# Altium PCB PCB1.PcbDoc
Units mm, origin at the board's own origin, x right, y up, seen from the top; angles counter-clockwise.
Board outline 59.94 x 91.22 mm, 2 copper layers (Top Layer, Bottom Layer); 64 components, 43 nets, 249 pads, 20 vias.
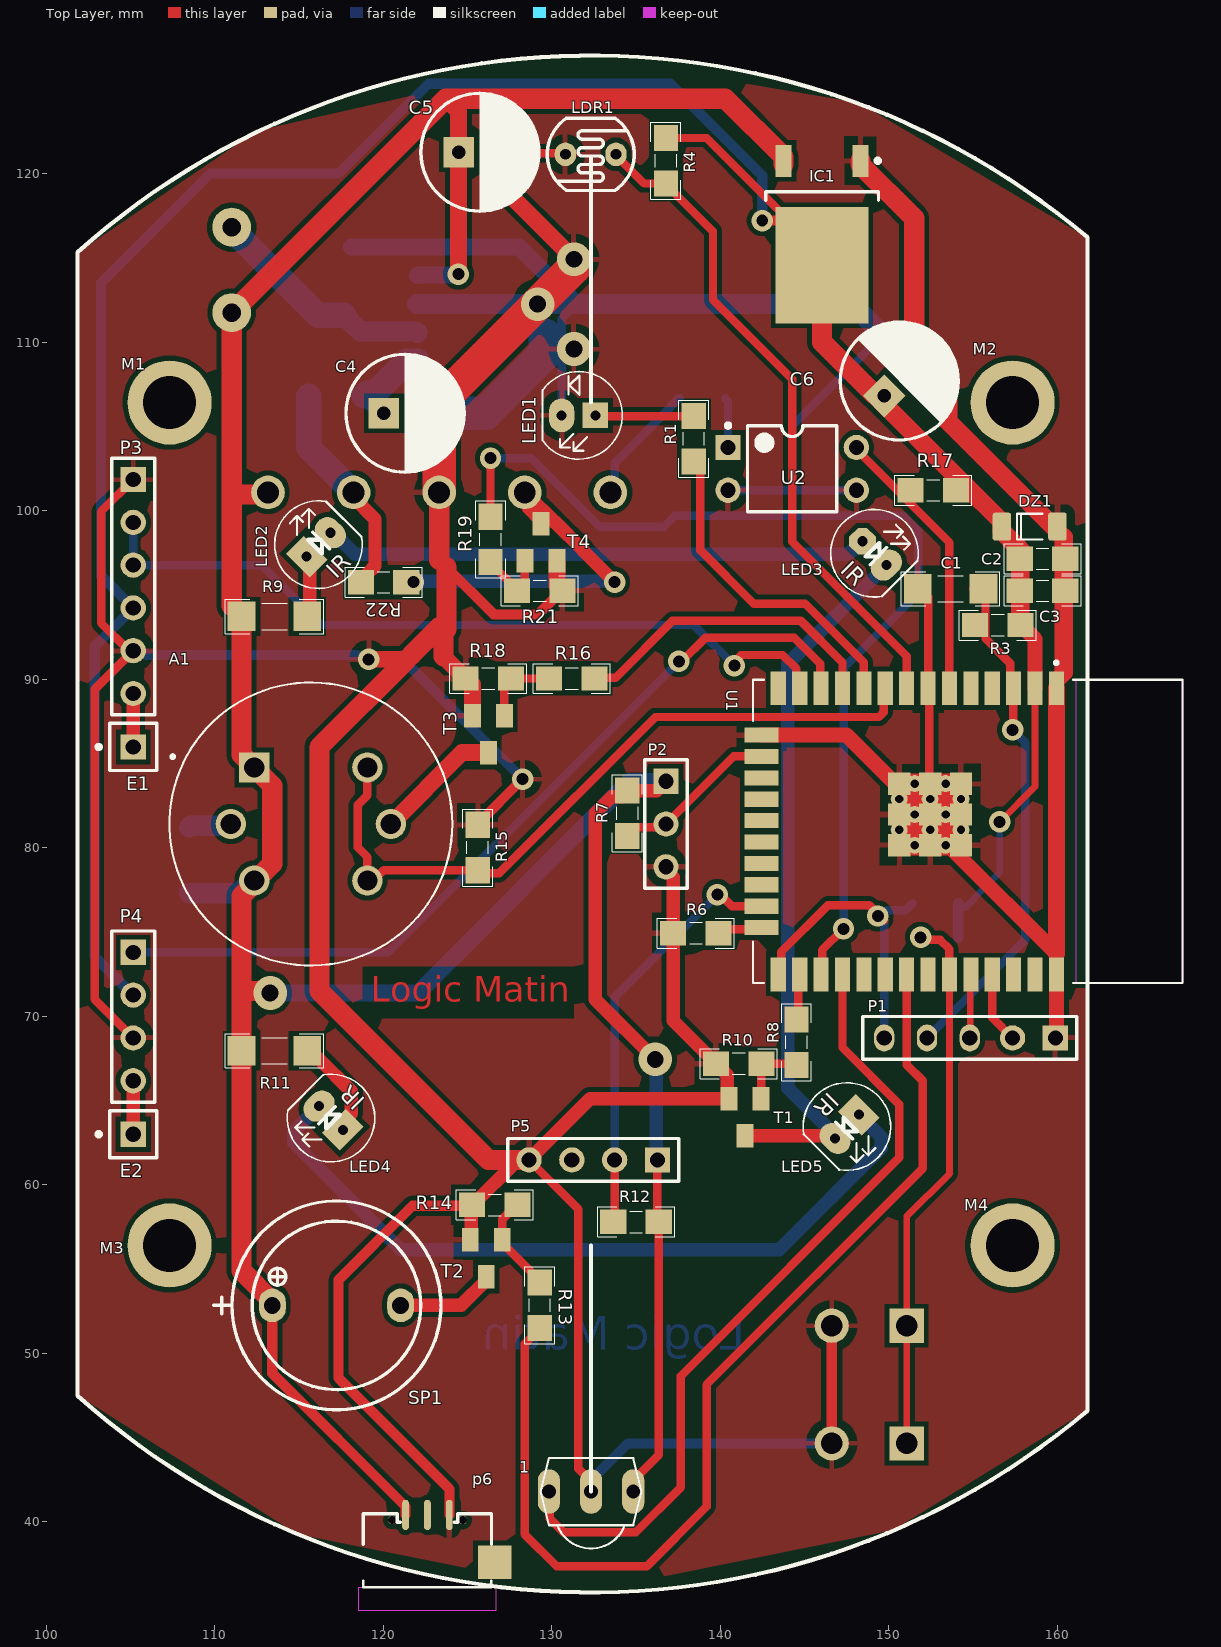
[diagram p0: Top Layer view]
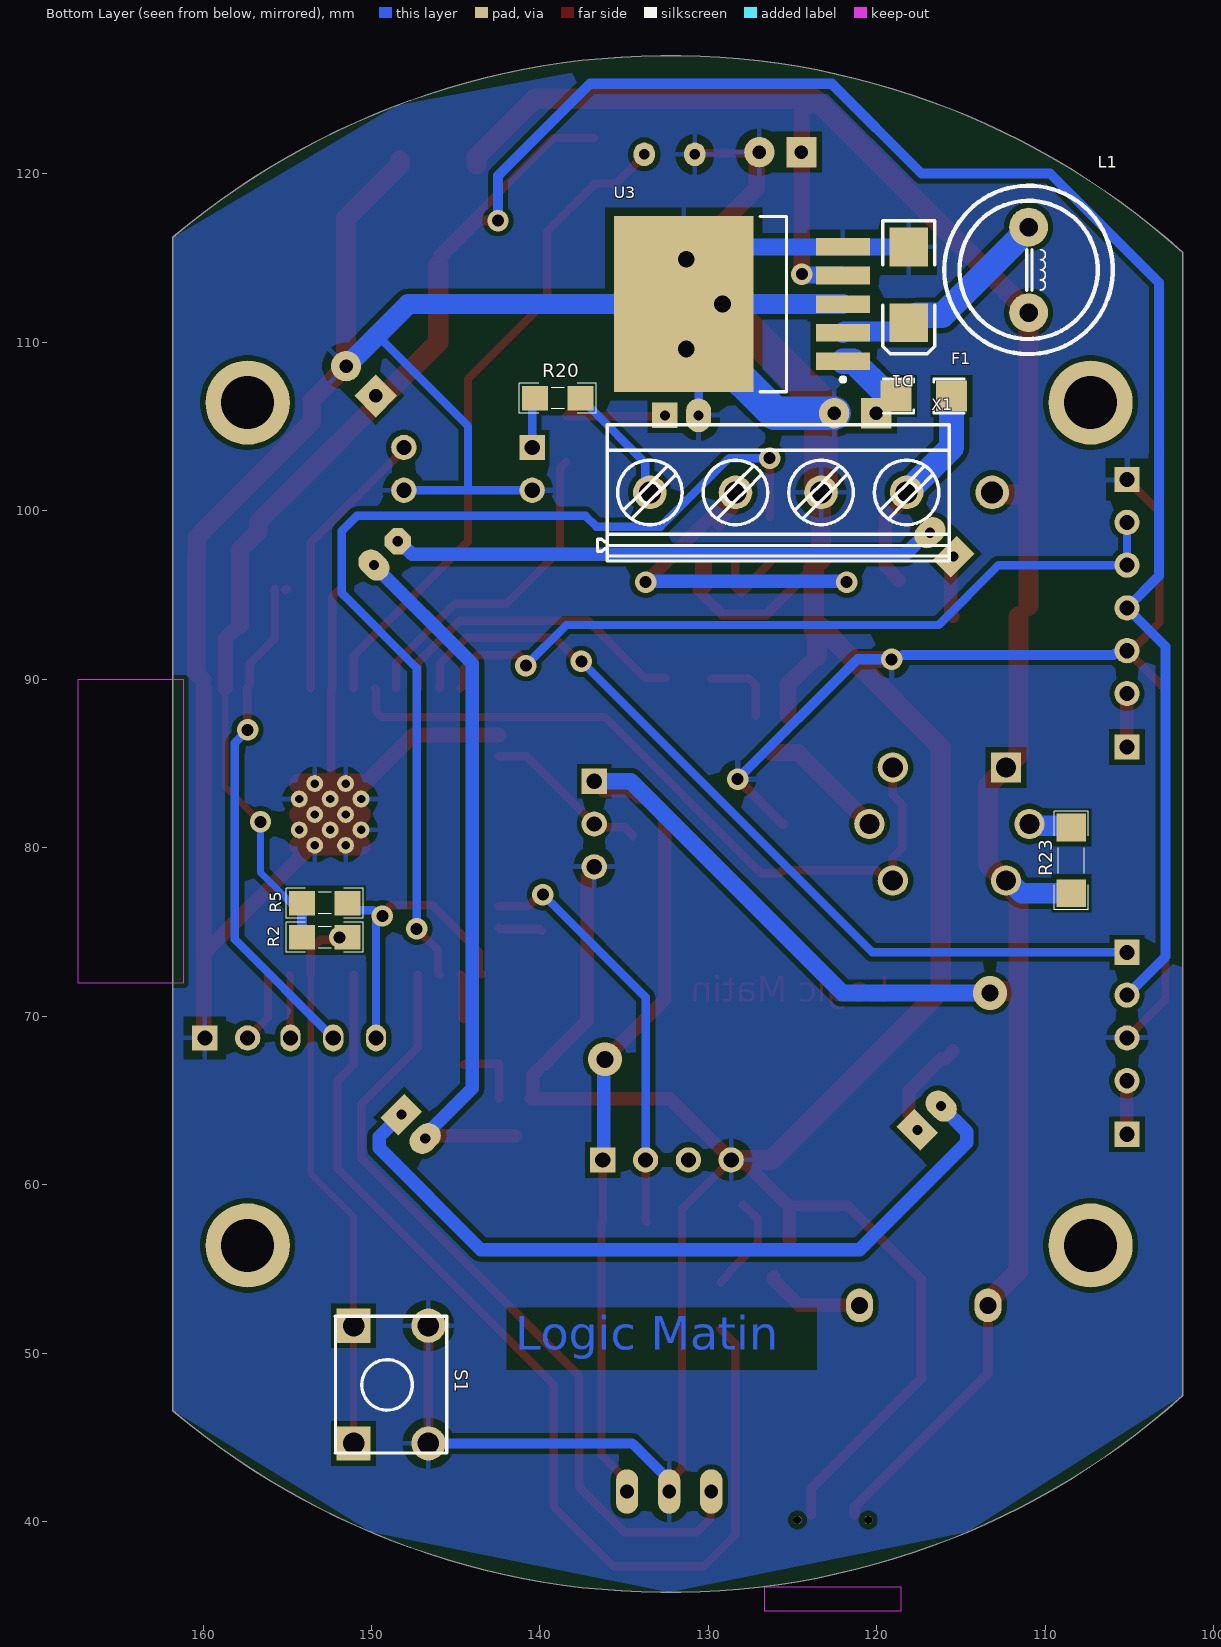
[diagram p1: Bottom Layer view, seen from below]

## Layer stack, top to bottom
Top Solder: solder mask 0.0102, Solder Resist, Dk 3.5
Top Layer: signal copper 0.0356
Dielectric 1: dielectric 0.32, FR-4, Dk 4.8
Bottom Layer: signal copper 0.0356
Bottom Solder: solder mask 0.0102, Solder Resist, Dk 3.5

## Board outline
101.854,47.471 ccw(c132.334,81.407) 161.798,46.585 161.798,116.229 ccw(c132.334,81.407) 101.854,115.343

## Design rules (kind name [scope] priority, off if disabled: settings)
Clearance [All] p1: gap=0.3 ignorepadtopadclearanceinfootprint=FALSE except(0: Arc-Hole Track-Hole SMDPad-Hole THPad-Hole Via-Hole Fill-Hole Poly-Hole Region-Hole Text-Hole; 0.254: Arc-Text Track-Text SMDPad-Text THPad-Text Via-Text Fill-Text Poly-Text Region-Text Text-Text)
PolygonConnect [All] p1: connectstyle=Relief reliefconductorwidth=0.3 reliefentries=4 polygonreliefangle="90 Angle" airgapwidth=0.5
RoomDefinition Main [InComponentClass('Main')] p1: confinementstyle=ConfineIn formatcopy=TRUE lockcomponents=FALSE outline 101.6,34.29 167.767,34.29 167.767,127.127 101.6,127.127
RoutingVias [All] p1: holewidth=0.711 width=1.27 viastyle="Through Hole" minholewidth=0.711 minwidth=1.27 maxholewidth=0.711 maxwidth=1.27
SolderMaskExpansion [All] p1: expansion=0.102 istentingtop=FALSE
Width [All] p1: maxlimit=10 minlimit=0.3 preferedwidth=0.3 minimp=50.000000 maximp=50.000000 favimp=50.000000
30 further rules are at their usual default settings.

## Components (designator, comment, footprint, x,y, rotation, side; value= is the part's Value field where it differs from the comment)
1 "TSOP1838" TSOP18XX 132.335,41.81 r0 top
A1 "MQ-2" XDCR_MQ-7 115.697,81.407 r0 top
C1 "1nF" CAPC4817X12N 153.67,95.377 r0 top
C2 "10nF" CAPC3413X12N 159.131,97.155 r180 top
C3 "100nF" CAPC3413X12N 159.131,95.25 r180 top
C4 "220uF16V" "Cap electrolitic radial 6x7-2.5" 121.285,105.791 r0 top
C5 "" "Cap electrolitic radial 6x7-2.5" 125.73,121.285 r0 top value=2200uF6.3V
C6 "2200uf" "Cap electrolitic radial 6x7-2.5" 150.627,107.701 r45 top value=2200uF6.3V
D1 "D Schottky" SMB 118.11,113.411 r270 bottom
DZ1 "3.3V" "SOD80, LL-34" 158.369,99.06 r0 top
E1 "Antenna" PIN1 105.156,85.979 r90 top
E2 "Antenna" PIN1 105.156,62.992 r90 top
F1 "F=1.0 A" "1206 FUSE" 117.221,106.807 r0 bottom
IC1 "LM1117DT-x.x" TD03B_N 146.044,116.427 r270 top
L1 "100µH 3A" "Inductor 10x12 (200 mils)" 110.998,114.3 r270 bottom
LDR1 "PhotoCell" PhotoCell 132.31,121.158 r180 top
LED1 "Red" LED-5mm 132.588,105.664 r180 top
LED2 "Red" LED-5mm-IR#1 115.443,97.282 r45 top
LED3 "Red" LED-5mm-IR#2 148.446,98.188 r315 top
LED4 "Red" LED-5mm-IR#1 117.602,63.246 r135 top
LED5 "Red" LED-5mm-IR#1 148.226,64.152 r225 top
M1 "Screw" "Board Screw_No Silk" 107.315,106.426 r0 top
M2 "Screw" "Board Screw_No Silk" 157.353,106.426 r0 top
M3 "Screw" "Board Screw_No Silk" 107.315,56.388 r0 top
M4 "Screw" "Board Screw_No Silk" 157.353,56.388 r0 top
P1 "Header 5" HDR1X5 159.893,68.707 r180 top
P2 "PIR Sensor" HDR1X3 136.779,83.947 r270 top
P3 "Header 6" HDR1X6 105.156,101.854 r270 top
P4 "Header 4" HDR1X4 105.156,73.787 r270 top
P5 "DHT11" HDR1X4 136.271,61.468 r180 top
p6 "USB Connector" USB_AB_BM_SHS 122.619,38.892 r180 top
R1 "220" RESC3413X04N 138.43,104.267 r270 top
R2 "4K7" RESC3413X04N 152.781,74.676 r0 bottom
R3 "10K" RESC3413X04N 156.464,93.218 r0 top
R4 "10K" RESC3413X04N 136.779,120.777 r90 top
R5 "4K7" RESC3413X04N 152.781,76.708 r0 bottom
R6 "4K7" RESC3413X04N 138.557,74.93 r0 top
R7 "4k7" RESC3413X04N 134.493,82.042 r270 top
R8 "120" RESC3413X04N 144.526,68.453 r270 top
R9 "33" RESC4817X04N 113.538,93.726 r180 top
R10 "10K" RESC3413X04N 141.097,67.183 r0 top
R11 "33" RESC4817X04N 113.538,67.945 r180 top
R12 "4K7" RESC3413X04N 135.001,57.785 r180 top
R13 "120" RESC3413X04N 129.286,52.832 r90 top
R14 "10K" RESC3413X04N 126.619,58.801 r0 top
R15 "10K" RESC3413X04N 125.603,80.01 r90 top
R16 "120" RESC3413X04N 131.191,90.043 r180 top
R17 "1K" RESC3413X04N 152.654,101.219 r0 top
R18 "10K" RESC3413X04N 126.238,90.043 r0 top
R19 "120" RESC3413X04N 126.365,98.298 r270 top
R20 "1K" RESC3413X04N 138.938,106.68 r180 bottom
R21 "10K" RESC3413X04N 129.286,95.25 r180 top
R22 "4k7" RESC3413X04N 120.015,95.758 r0 top
R23 "0" RESC4817X04N 108.458,79.248 r90 bottom
S1 "Switch PB" "Switch - Push to On" 148.844,48.133 r90 bottom
SP1 "" "BUZZER 7.62mm DC" 117.221,52.832 r0 top
T1 "AO3400" SOT23 141.478,64.008 r180 top
T2 "AO3400" SOT23 126.111,55.626 r180 top
T3 "AO3400" SOT23 126.238,86.741 r180 top
T4 "AO3400" SOT23 129.352,98.128 r0 top
U1 "ESP32-WROOM-32" MODULE_ESP32-WROOM-32 154.697,80.972 r270 top
U2 "Optoisolator1" DIP-4 144.272,102.489 r0 top
U3 "LM2596S-5.0/NOPB" TS5B_N 128.016,112.268 r0 bottom
X1 "CON_Phoenix_MKDSN_04" CON_MKDSN1,5/4-5,08 125.857,101.092 r180 bottom

## Footprints (in the part's own frame and the unit in brackets; to place one, negate y for a bottom-side part, rotate by r counter-clockwise, add the part's x,y. Pads: shape width x height; smd on the part's side, far side on the other; paste and mask are expansions set on the pad)
"1206 FUSE" [mm] "Fast Acting Smd 1206 non-Resettable Fuse Chip For Pcb Board-Design:Abbas Basereh"
  rect 1.85x1.85 smd: 1(-1.65,0) 2(1.65,0)
  silkscreen extent -2.41,-1.02 2.41,1.02, body extent -1.6,-0.8 1.6,0.8, height 1
"Board Screw_No Silk" [mm]
  round 5 hole 3.15 mask+0.1: S(0,0)
  round 0.6 all layers, no hole: ""(-2,0) ""(-1.414,-1.414) ""(-1.414,1.414) ""(0,-2) ""(0,2) ""(1.414,-1.414) ""(1.414,1.414) ""(2,0)
"BUZZER 7.62mm DC" [mm] "BUZZER 12mm DIA , 7.62mm pitch DESIGNER ABBAS BASEREH"
  oval 1.6x2 hole 1: 1(-3.81,0) 2(3.81,0)
  silkscreen extent -7.3,-6.2 6.2,6.2, body extent -6,-6 6,6, height 9.5
"Cap electrolitic radial 6x7-2.5" [mm] "Cap electrolitic radial 6x7-2.5-Design:Abbas Basereh"
  rect 1.8x1.8 hole 0.8: 1(-1.25,0)
  round 1.8 hole 0.8: 2(1.25,0)
  silkscreen extent -3.5,-3.5 3.6,3.5, body extent -3,-3 3,3, height 7.3
CAPC3413X12N [mm] "Chip Capacitor, 2-Leads, Body 3/40x1/30mm, IPC Medium Density-Design:Abbas Basereh"
  rect 1.55x1.45 smd: 1(-1.35,0) 2(1.35,0)
  silkscreen extent -2.29,-0.89 2.29,0.89, body extent -1,-0.62 1,0.63, height 0.78
CAPC4817X12N [mm] "Chip Capacitor, 2-Leads, Body 4/80x1/70mm, IPC Medium Density-Design:Abbas Basereh"
  rect 1.65x1.75 smd: 1(-1.95,0) 2(1.95,0)
  silkscreen extent -2.92,-1.02 2.92,1.02, body extent -1.6,-0.8 1.6,0.8, height 1
CON_MKDSN1,5/4-5,08 [mm]
  round 2 hole 1.3: 1(-7.62,0) 2(-2.54,0) 3(2.54,0) 4(7.62,0)
  silkscreen extent -10.73,-4.07 10.16,4.03, body extent -10.72,-4.05 10.17,4.05, height 10.03
DIP-4 [mm] "DIP; 4 Leads; Row Spacing 7.62 mm; Pitch 2.54 mm"
  rect 1.5x1.5 hole 0.9: 1(-3.81,1.27)
  round 1.5 hole 0.9: 2(-3.81,-1.27) 3(3.81,-1.27) 4(3.81,1.27)
  silkscreen extent -3.93,-2.55 2.65,2.69, body extent -3.15,-2.5 3.15,2.5, height 5.6
HDR1X3 [mm] "Connector; Header; 3 Position"
  rect 1.5x1.5 hole 0.9: 1(0,0)
  round 1.5 hole 0.9: 2(2.54,0) 3(5.08,0)
  silkscreen extent -1.27,-1.27 6.35,1.27
HDR1X4 [mm] "Connector; Header; 4 Position"
  rect 1.5x1.5 hole 0.9: 1(0,0)
  round 1.5 hole 0.9: 2(2.54,0) 3(5.08,0) 4(7.62,0)
  silkscreen extent -1.27,-1.27 8.89,1.27
HDR1X5 [mm] "Connector; Header; 5 Position"
  rect 1.5x1.5 hole 0.9: 1(0,0)
  round 1.5 hole 0.9: 2(2.54,0)
  oval 1.2x1.6 hole 0.9: 3(5.08,0) 4(7.62,0) 5(10.16,0)
  silkscreen extent -1.27,-1.27 11.43,1.27
HDR1X6 [mm] "Connector; Header; 6 Position"
  rect 1.5x1.5 hole 0.9: 1(0,0)
  round 1.5 hole 0.9: 2(2.54,0) 3(5.08,0) 4(7.62,0) 5(10.16,0) 6(12.7,0)
  silkscreen extent -1.27,-1.27 13.97,1.27
"Inductor 10x12 (200 mils)" [mm] "POWER INDUCTOR 10x12 (200 mils) DESIGNER ABBAS BASEREH"
  round 2.3 hole 1.1: 1(-2.54,0) 2(2.54,0)
  silkscreen extent -5,-5 5,5, body extent -5,-5 5,5, height 12.13
LED-5mm [mm]
  rect 1.5x1.5 hole 0.6: 1(0,0)
  oval 1.5x2 hole 0.6: 2(2,0)
  silkscreen extent -1.6,-2.6 3.13,2.6
LED-5mm-IR#1 [mm]
  rect 1.5x2 hole 0.6: 1(0,0)
  oval 1.5x2 hole 0.6: 2(2,0)
  silkscreen extent -1.6,-2.6 3.13,2.6
LED-5mm-IR#2 [mm]
  oct 1.5x1.5 hole 0.6: 1(0,0)
  oval 1.5x2 hole 0.6: 2(2,0)
  silkscreen extent -1.6,-2.6 3.13,2.6
MODULE_ESP32-WROOM-32 [mm]
  rect 2x0.9 smd: 1(-8.5,5.26) 2(-8.5,3.99) 3(-8.5,2.72) 4(-8.5,1.45) 5(-8.5,0.18) 6(-8.5,-1.09) 7(-8.5,-2.36) 8(-8.5,-3.63) 9(-8.5,-4.9) 10(-8.5,-6.17) 11(-8.5,-7.44) 12(-8.5,-8.71) 13(-8.5,-9.98) 14(-8.5,-11.25) 25(8.5,-11.25) 26(8.5,-9.98) 27(8.5,-8.71) 28(8.5,-7.44) 29(8.5,-6.17) 30(8.5,-4.9) 31(8.5,-3.63) 32(8.5,-2.36) 33(8.5,-1.09) 34(8.5,0.18) 35(8.5,1.45) 36(8.5,2.72) 37(8.5,3.99) 38(8.5,5.26)
  rect 0.9x2 smd: 15(-5.715,-12.25) 16(-4.445,-12.25) 17(-3.175,-12.25) 18(-1.905,-12.25) 19(-0.635,-12.25) 20(0.635,-12.25) 21(1.905,-12.25) 22(3.175,-12.25) 23(4.445,-12.25) 24(5.715,-12.25)
  rect 1.33x1.33 smd: 39_1(-2.835,-0.405) 39_2(-1,-0.405) 39_3(0.835,-0.405) 39_4(-2.835,-2.24) 39_5(-1,-2.24) 39_6(0.835,-2.24) 39_7(-2.835,-4.075) 39_8(-1,-4.075) 39_9(0.835,-4.075)
  round 1 hole 0.5: 39_10(-1.917,-0.405) 39_11(-0.082,-0.405) 39_12(-2.835,-1.322) 39_13(-1,-1.322) 39_14(0.835,-1.322) 39_15(-1.917,-2.24) 39_16(-0.082,-2.24) 39_17(-2.835,-3.157) 39_18(-1,-3.157) 39_19(0.835,-3.157) 39_20(-1.917,-4.075) 39_21(-0.082,-4.075)
  Keep-Out Layer region: 9,6.45 -9,6.45 -9,12.75 9,12.75
  Keep-Out Layer region: 9,6.45 -9,6.45 -9,12.75 9,12.75
  silkscreen extent -10.1,-12.75 9,12.75
PhotoCell [mm]
  oval 1.27x1.397 hole 0.635: 1(-1.5,0) 2(1.5,0)
  silkscreen extent -2.58,-2.15 2.58,2.15, body extent -2.61,-2.16 2.61,2.14, height 2.44
PIN1 [mm] "Generic Antenna; 1 Lead"
  rect 1.5x1.5 hole 0.9: 1(0,0)
  silkscreen extent -1.4,-1.4 1.4,2.17
RESC3413X04N [mm] "Chip Resistor, 2-Leads, Body 3/40x1/30mm, IPC Medium Density-Design:Abbas Basereh"
  rect 1.55x1.45 smd: 1(-1.35,0) 2(1.35,0)
  silkscreen extent -2.29,-0.89 2.29,0.89, body extent -1.25,-0.62 1.25,0.62, height 0.79
RESC4817X04N [mm] "Chip Resistor, 2-Leads, Body 4/80x1/70mm, IPC Medium Density-Design:Abbas Basereh"
  rect 1.65x1.75 smd: 1(-1.95,0) 2(1.95,0)
  silkscreen extent -2.92,-1.02 2.92,1.02, body extent -1.6,-0.8 1.6,0.8, height 1
SMB [mm] "DO-214-AA/SMB; 2 C-Bend Leads; Body 5.3 x 3.6 mm, inc. leads (LxW)"
  rect 2.3x2.3 smd: 1(-2.25,0) 2(2.25,0)
  silkscreen extent -3.8,-1.55 4.1,1.55
"SOD80, LL-34" [mm] "Diode, MiniMELF"
  round 0.5 on Mech15: 0(0,0)
  rrect25% 1.1x1.65 smd: 1(1.65,0) 2(-1.65,0)
  silkscreen extent -0.76,-0.76 0.76,0.76, body extent -1.88,-0.8 1.82,0.8, height 1.6
SOT23 [mm]
  rect 1x1.4 smd: 1(-0.95,-1.1) 2(0.95,-1.1) 3(0,1.1)
"Switch - Push to On" [mil]
  rect 80x80 hole 50: 1(-137.5,87.5) 1(137.5,87.5)
  round 80 hole 50: 2(-137.5,-87.5) 2(137.5,-87.5)
  silkscreen extent -160,-130 160,130, body extent -155,-121 157,123, height 205
TD03B_N [mm] "D-PAK, 4-Leads, Body 6.1x6.6mm, Pitch 2.29mm, Lead Span 9.7mm, IPC Medium Density"
  rect 1.9x0.95 smd: 1(-4.35,2.28) 3(-4.35,-2.28)
  rect 6.9x5.5 smd: 4(1.85,0)
  silkscreen extent -4.47,-3.35 -2,3.43, body extent -5.18,-3.27 4.76,3.27, height 2.34
TS5B_N [mm] "D2-PAK, 6-Leads, Body 8.6x10.2mm, Pitch 1.7mm, Lead Span 14.1mm, IPC Medium Density"
  rect 3.2x1.05 smd: 1(-6,3.4) 2(-6,1.7) 3(-6,0) 4(-6,-1.7) 5(-6,-3.4)
  rect 8.3x10.45 smd: 6(3.45,0)
  silkscreen extent -6.12,-5.2 -1.1,5.2, body extent -2.65,-5.2 6.24,5.2, height 4.65
TSOP18XX [mil]
  oval 52x104 hole 32: GND(-0.05,-1.05) OUT(-98.47,-1.05) VCC(98.38,-1.05)
  silkscreen extent -118,-134 118,78
USB_AB_BM_SHS [mm] "USB Micro AB - Standard (Bottom mount), Shell SMT DESIGNER ABBAS BASEREH"
  oval 0.4x1.8 smd: 1(1.3,-1.5) 3(0,-1.5) 5(-1.3,-1.5)
  rect 2x2 smd: 6(-4,1.3)
  round 0.5 hole 0.5: H(-2.1,-1.2) H(2.1,-1.2)
  Keep-Out Layer board cut-out: -4.064,2.8 -4.064,4.191 4.064,4.191 4.064,2.8
  silkscreen extent -3.8,-1.57 3.8,2.8, body extent -4,-1.88 4,4.16, height 2.75
XDCR_MQ-7 [mm]
  rect 1.8x1.8 hole 1.2: 1(-3.359,3.359)
  round 1.8 hole 1.2: 2(-4.75,0) 3(-3.359,-3.359) 4(3.359,-3.359) 5(4.75,0) 6(3.359,3.359)
  silkscreen extent -8.4,-8.4 8.4,8.4

## Part data
1: "IR Remote Receiver 38KHz 35m 3-Pin", Package=None, Availability=Unavailable, MF=Vishay, MP=TSOP1838, Price=None, SnapEDA_Link=https://www.snapeda.com/parts/TSOP1838/Vishay/view-part/561684/?ref=snap
A1: library part MQ-7, "Gas Sensor, High sensitivity to carbon monoxide", Package=Package, Availability=Unavailable, Check_prices=https://www.snapeda.com/parts/MQ-7/Hanwei%20Electronics%20Co.,%20Ltd/view-part/5661821/?ref=eda, MF="Hanwei Electronics Co., Ltd", MP=MQ-7, Price=None, SnapEDA_Link=https://www.snapeda.com/parts/MQ-7/Hanwei%20Electronics%20Co.,%20Ltd/view-part/5661821/?ref=snap
C1: library part "CAP SMD 1206", "CAP 1206", Data=16-12-2016, Desc.="CAP SMD 1206", Designer="Abbas Basereh"
C2 C3: library part "CAP SMD 0805", "CAP 0805", Data=16-12-2016, Desc.="CAP SMD 0805", Designer="Abbas Basereh"
C4 C5 C6: library part "Cap ELECTROLITIC TOTAL SIZE", "Cap electrolitic radial", Data=16-12-2016, Designer="Abbas Basereh"
D1: "Schottky Diode", PartNumber=1N5822, Code_JEDEC=DO-214-AA, LatestRevisionDate=17-Jul-2002, LatestRevisionNote="Re-released for DXP Platform.", PackageDescription="DO-214-AA/SMB; 2 C-Bend Leads; Body 5.3 x 3.6 mm, inc. leads (LxW)", PackageReference=SMB, Published=8-Jun-2000, Publisher="Altium Limited"
DZ1: library part "ZENER GENERAL DIODE", "DIODE ZENER GENERAL", ComponentLink1Description="Manufacturer Link", ComponentLink2Description=Datasheet, PackageDescription="DIODE GEN ZENER", PackageReference="DO 35", PackageVersion=2017-1-12, Published=2017-1-12, Publisher="Abbas Basereh"
E1 E2: "Generic Antenna", LatestRevisionDate=17-Jul-2002, LatestRevisionNote="Re-released for DXP Platform.", PackageReference=PIN1, Published=24-Mar-1999, Publisher="Altium Limited"
F1: library part "Fuse SMD1206", "SMD Fuses 1206", Data=16-12-2016, Desc.="SMD Fuses 1206", Designer="Abbas Basereh"
IC1: library part LM1117DT-3.3, "x.x Volt, 800mA Low-Dropout Linear Regulator, 3-pin TO-252", Manufacturer="National Semiconductor", PackageTopMarking=NSUZXYTT*LM1117*DT-X.X, PowerWise=N, Code_JEDEC=TO-252-AA, ComponentLink1Description="LM1117 Datasheet", ComponentLink1URL=http://www.national.com/ds/LM/LM1117.pdf, ComponentLink2Description="LM1117 Web Page", ComponentLink2URL=http://www.national.com/pf/LM/LM1117.html, ComponentLink3Description="TD03B Package Page", ComponentLink3URL=http://www.national.com/packaging/folders/td03b.html, CompType="LDO IC", DatasheetVersion=Apr-2006, PackageDescription="TO252, Molded, Jedec, 6.8 x 6.10 x 2.30mm Body, 3 Lead, 2.28mm Pitch, Surface Mount", PackageReference=TD03B, PackageVersion="revD, Feb-2009", PartNumber=LM1117DT-3.3, PinCount=3, RoHS=N, Supplier 1=Farnell, Supplier 2=Farnell
L1: library part "POWER INDUCTOR 10x12 (200 mils)", "POWER INDUCTOR 10x12 (200 mils)", Operating Temperature="-40°C ~ 125°C", Tolerance=±20%, Package / Case="POWER INDUCTOR 10x12 (200 mils)", Publisher="ABBAS BASEREH  2017-3-1", SCDType=source, Supplier 1=Digi-Key, Type="Ferrite Core"
LDR1: library part LDR, "Photo Cell- Variable Resistor With Light", Company="IPA CO.", Designer="Saeid Jorablo", Last Update Time=2008/07/17
LED1 LED2 LED3 LED4 LED5: library part LED, "LED", Adding Date=1387/12/22, Color=Red, Designer="Saeid Jorablo", Organazation=ControTec
M1 M2 M3 M4: library part "Board Screw", "Board Screw With Spacer"
P1: "Header, 5-Pin", LatestRevisionDate=17-Jul-2002, LatestRevisionNote="Re-released for DXP Platform.", Publisher="Altium Limited"
P2: library part "Header 3", "Header, 3-Pin", LatestRevisionDate=17-Jul-2002, LatestRevisionNote="Re-released for DXP Platform.", Publisher="Altium Limited"
P3: "Header, 6-Pin", LatestRevisionDate=17-Jul-2002, LatestRevisionNote="Re-released for DXP Platform.", Publisher="Altium Limited"
P4: "Header, 4-Pin", LatestRevisionDate=17-Jul-2002, LatestRevisionNote="Re-released for DXP Platform.", Publisher="Altium Limited"
P5: library part "Header 4", "Header, 4-Pin", LatestRevisionDate=17-Jul-2002, LatestRevisionNote="Re-released for DXP Platform.", Publisher="Altium Limited"
p6: library part "USB AB MICRO CONNECTOR", "USB MICRO-B Type Connector", Max Current=1600mA, Category=Connector, ComponentLink1Description=Datasheet, ComponentLink2Description=Reference, Designer="ABBAS BASEREH", Mounting Technology="Surface Mount\Through-Hole", Pin Count=5-7, Publisher="ABBAS BASEREH", Status=Unreleased, Update=1395-11-17
R1 R2 R3 R4 R5 R6 R7 R8 R10 R12 R13 R14 R15 R16 R17 R18 R19 R20 R21 R22: library part "RES 0805 0.125W", "RES 0805", Data=16-12-2016, Desc.="RES SMD 0805", Designer="Abbas Basereh"
R9 R11 R23: library part "RES 1206 0.25W", "RES 1206", Data=16-12-2016, Desc.="RES SMD 1206", Designer="Abbas Basereh"
S1: "Push Button Switch"
SP1: library part "PIEZO BUZZER", "PIEZO BUZZER ACTIVE", Comment_1="SPEAKER AND BEEP", ComponentLink2Description=Reference, Design Date=1395/11/14, Designer="Abbas Basereh", Mounting Technology=THD, PackageDescription=THD, Pin Count=2, Publisher="Abbas Basereh", Status=Unreleased
T1 T2 T3 T4: "N-Channel 30V 5.8A _Ta_ 1.4W _Ta_ Surface Mount SOT-23-3", Package="SOT-23-3 Alpha &amp; Omega Semiconductor", Availability=Unavailable, MF="Alpha &", MP=AO3400, Price=None, SnapEDA_Link=https://www.snapeda.com/parts/AO3400/Alpha%20%26%20Omega%20Semiconductor%20Inc./view-part/1321993/?ref=snap
U1: "Bluetooth, WiFi Transceiver Module 2.4GHz ~ 2.5GHz Surface Mount", Package="Module Espressif Systems", Digi-Key_Part_Number=1904-1010-1-ND, Digi-Key_Purchase_URL=https://www.digikey.com/product-detail/en/espressif-systems/ESP32-WROOM-32/1904-1010-1-ND/8544305?utm_source=snapeda&utm_medium=aggregator&utm_campaign=symbol, MF="Espressif Systems", MP=ESP32-WROOM-32, SnapEDA_Link=https://www.snapeda.com/parts/ESP32-WROOM-32/Espressif%20Systems/view-part/2753322/?ref=snap
U2: "4-Pin Phototransistor Optocoupler", DatasheetVersion=Nov-2003, LatestRevisionDate=04-Mar-2005, LatestRevisionNote="Sch pins 3 & 4 Swapped.", PackageReference=DIP-4, Published=24-Mar-1999, Publisher="Altium Limited"
U3: "SIMPLE SWITCHER® Power Converter 150 KHz 3A Step-Down Voltage Regulator, 5-pin TO-263, Pb-Free", Manufacturer="National Semiconductor", PackageTopMarking="NSUZXYTTE#*LM2596S*-5.0 P+", PowerWise=N, Code_JEDEC=MO-169-AB, ComponentLink1Description="Manufacturer URL", ComponentLink1URL=http://www.national.com/, ComponentLink2Description="LM2596 Datasheet", ComponentLink2URL=http://www.national.com/ds/LM/LM2596.pdf, ComponentLink3Description="LM2596 Web Page", ComponentLink3URL=http://www.national.com/pf/LM/LM2596.html, ComponentLink4Description="TS5B Package Page", ComponentLink4URL=http://www.national.com/packaging/folders/ts5b.html, CompType=Switcher, DatasheetVersion=May-2002, High-Reliability=Y, PackageDescription="TO-263, Molded, .400 x .390 x .180in, 5 Lead, .067in Pitch, Surface Mount", PackageReference=TS5B, PackageVersion="revD, Apr-2005", PartNumber=LM2596S-5.0/NOPB, PinCount=5, RoHS=Y
X1: Manufacturer="PHOENIX CONTACT", Max Current="13.5 A", Voltage="400 V", Category=Connector, Company="SJ Libraries", ComponentLink1Description=Datasheet, ComponentLink2Description=Reference, Connector type="PCB Terminal Block", Designer="Eng. Saeid Jorablo", HelpURL=http://s3.picofile.com/file/7443264187/Coming_Soon_logo.gif, Mounting Technology=Through-Hole, Pin Count=4, Positions=4, Publisher="SJ UnLimited", Revision 1="2012/10/1 : Adding Model", Status=Unreleased, Update=2012/10/1

## Free pads (board coordinates)
  round 2 hole 1.3: 8(113.157,101.092)

## Via types
v1: diameter 1.27, hole 0.711, Top Layer to Bottom Layer, 15 vias
v2: diameter 2, hole 1, Top Layer to Bottom Layer, 5 vias

## Nets (pads, with @x,y where several pads share a name; then routed paths per layer and width w, separated by ;. In a path a pad name is that pad's centre, name@x,y a point inside that pad or via, vN(x,y) a via of type N, cw(c..) or ccw(c..) an arc to the next point about the centre after c; other vN are vias at no path point)
433_RX: P3.2 P3.3 U1.13 | length 46.4
  Top Layer w0.5: v1(140.843,90.805) 140.843,91.013 141.224,91.394 141.224,91.44 143.707,91.44 144.517,90.63 144.517,89.672 U1.13
  Bottom Layer w0.5: P3.2 P3.3 112.776,96.774 116.332,93.218 138.43,93.218 v1(140.843,90.805)
433_TX: P4.1 U1.12 | length 50.6
  Top Layer w0.5: v1(137.541,91.059) 137.711,91.059 139.108,92.456 144.399,92.456 145.93,90.925 145.93,89.529 U1.12
  Bottom Layer w0.5: P4.1 120.269,73.787 v1(137.541,91.059)
BOOT: P1.5 R5.1 U1.25 | length 18.4
  Top Layer w0.5: U1.25 143.619,72.644 143.619,73.811 146.389,76.581 148.844,76.581 v1@149.733,75.692
  Bottom Layer w0.5: v1(149.352,75.946) 149.56,75.946 149.906,76.292 151.015,76.292 R5.1 ; P1.5 v1@149.733,75.692
Buzzer_MCU: R13.1 U1.31 | length 62.9
  Top Layer w0.5: R13.1 129.286,51.432 128.397,50.543 128.397,39.243 130.302,37.338 135.636,37.338 139.192,40.894 139.192,48.133 152.019,60.96 152.019,66.167 151.067,67.119 U1.31
Buzzer_MosPowered: SP1.2 T2.3 | length 5.9
  Top Layer w0.8: SP1.2 124.617,52.832 126.111,54.326 T2.3
DHT11: P5.2 R12.2 U1.23 | length 24.9
  Top Layer w0.5: R12.2 133.731,57.865 P5.2 ; v1(139.827,77.216) 140.008,77.216 140.697,76.527 U1.23
  Bottom Layer w0.5: P5.2 133.731,71.12 v1(139.827,77.216)
EN: C1.2 P1.4 R3.1 U1.3 | length 30.3
  Top Layer w0.5: C1.2@155.02,95.377 C1.2@155.114,95.283 ; C1.2@155.747,95.377 155.747,93.218 155.747,92.411 157.217,90.941 157.217,89.672 U1.3 157.385,89.44 157.385,87.027 v1(157.353,86.995)
  Bottom Layer w0.5: P1.4 158.115,74.549 158.115,86.233 v1(157.353,86.995)
GND: 1.GND C1.1 C2.1 C3.1 C4.2 C5.2 C6.2 D1.1 DZ1.1 IC1.1 LDR1.2 LED1.2 P1.1 P2.3 P3.1 P3.5 P4.3 P5.4 p6.5 R6.1 R10.1 R14.1 R15.2 R18.1 R21.1 S1.2 T1.2 T2.2 T3.2 T4.2 U1.1 U1.7 U1.15 U1.38 U1.39_1 U1.39_2 U1.39_3 U1.39_4 U1.39_5 U1.39_6 U1.39_7 U1.39_8 U1.39_9 U1.39_10 U1.39_11 U1.39_12 U1.39_13 U1.39_14 U1.39_15 U1.39_16 U1.39_17 U1.39_18 U1.39_19 U1.39_20 U1.39_21 U2.2 U2.3 U3.3 U3.5 U3.6 X1.3 | length 457.3
  Top Layer w0.5: P4.3 102.87,70.993 102.87,89.408 P3.5 104.902,91.694 103.251,93.345 103.251,99.949 P3.1 ; R15.2@125.556,81.407 R15.2 ; C5.2 127.044,121.221 130.746,121.221 LDR1.2 ; P5.4 131.572,58.547 131.572,43.147 132.334,42.385 1.GND ; C1.1@151.847,95.377 152.337,94.887 U1.7 152.397,89.412 152.397,83.867 U1.39_4
  Top Layer w0.6: 123.317,97.091 123.745,96.663 126.555,93.853 129.189,93.853 130.586,95.25 R21.1 ; p6.5 123.919,41.943 117.348,48.514 117.348,54.356 121.739,58.747 R14.1@125.215,58.747 ; R15.2@125.556,81.407 125.6,81.407 128.267,84.074 v1(128.27,84.074) ; S1.2@146.621,44.64 S1.2@146.621,51.625
  Top Layer w0.8: T2.2 125.215,56.78 125.215,58.747 R14.1 125.319,58.801 127.852,61.334 ; P5.4 132.291,65.108 T1.2 140.428,65.208 140.428,66.502 R10.1@140.122,66.808 ; P2.3 136.779,78.678 137.207,78.25 R6.1 137.207,69.723 139.372,67.558 139.372,67.508 139.697,67.183 R10.1
  Top Layer w0.9: U1.15 147.501,86.687 U1.39_7@150.381,83.807 ; U1.39_14 153.394,80.118 153.552,80.118 153.912,79.757 159.957,73.713 U1.38 159.957,68.771 P1.1
  Top Layer w1: v1(119.126,91.186) 121.412,91.186 121.666,91.44 ; 123.571,91.36 R18.1 124.938,90.043 125.288,89.693 T3.2 ; C5.2 127.133,121.132 127.133,119.12 v2(131.318,114.935) ; R21.1@130.302,95.534 T4.2 ; 159.957,73.713 U1.1 ; U1.1@160.007,89.972 160.37,90.335 U1.1@160.37,90.397
  Top Layer w1.1: C6.2 153.543,106.553 153.543,105.283 160.019,98.807 160.019,98.785 160.383,98.421 160.383,97.173 160.401,97.155 160.401,95.25 160.401,90.428 U1.1@160.37,90.397
  Top Layer w1.2: 121.412,91.186 116.205,85.979 116.205,71.501 126.238,61.468 127.852,61.468 P5.4@128.621,61.468 ; 121.666,91.44 123.317,93.091 ; 123.317,97.091 X1.3 ; 123.571,91.36 123.571,93.091 ; 123.745,92.967 123.745,96.663 ; IC1.1 148.324,120.552 151.511,117.365 C6.2 ; U1.39_8 U1.39_18 U1.39_5 ; U1.39_2 U1.39_13 U1.39_5 ; U1.39_5 153.931,80.498 U1.39_3 U1.39_14 U1.39_6 U1.39_19 U1.39_9 U1.39_5 ; U1.39_5 U1.39_7 U1.39_17 U1.39_4 U1.39_12 U1.39_1 U1.39_5
  Top Layer w2: X1.3 123.317,105.791 123.317,106.426 v2(129.159,112.268) 131.318,114.427 v2(131.318,114.935)
  Bottom Layer w0.5: LED1.2 130.588,111.39 U3.6 ; U2.2 144.272,101.219 ; U2.3 144.272,101.219 ; 149.669,110.426 144.272,105.029 144.272,101.219
  Bottom Layer w0.6: P3.5 105.328,91.522 105.876,91.522 105.957,91.44 118.44,91.44 ; v1(119.126,91.186) 121.158,91.186 v1(128.27,84.074) ; 1.GND 132.334,42.443 134.531,44.64 S1.2@146.621,44.64
  Bottom Layer w1: D1.1 118.113,115.664 122.012,115.664 U3.5 128.066,115.668 U3.6
  Bottom Layer w1.2: U3.3 v2(129.159,112.268) U3.6 147.828,112.268 149.669,110.426 C6.2
  Bottom Layer w2: C4.2 126.064,105.791 129.614,109.341 U3.6@129.614,110.416
  other v2: 131.318,109.601
Input: R20.2 X1.1 | length 7.3
  Bottom Layer w0.5: X1.1 133.75,101.365 133.75,102.842 137.063,106.155 137.063,106.205 137.538,106.68 R20.2
Input_mcu: R17.1 U1.6 U2.4 | length 16.6
  Top Layer w0.5: U2.4 148.082,103.633 153.607,98.108 U1.6
IR_MCU: R8.1 U1.26 | length 2.7
  Top Layer w0.5: R8.1 144.621,69.898 144.621,72.376 U1.26
IR_MosPowered: LED3.2 LED5.2 T1.3 | length 43
  Top Layer w0.8: T1.3 141.481,62.911 146.639,62.911 LED5.2
  Bottom Layer w0.8: LED5.2 146.812,62.927 144.018,65.721 144.018,90.932 LED3.2
IR_Remote_Receiver: 1.OUT U1.28 | length 48
  Top Layer w0.5: 1.OUT 129.88,41.737 129.88,40.174 130.683,39.37 135.001,39.37 137.668,42.037 137.668,48.641 150.622,61.595 150.622,64.77 147.257,68.135 U1.28
LDR_ADC: LDR1.1 R4.1 U1.8 | length 39.6
  Top Layer w0.5: LDR1.1 133.81,121.094 135.477,119.427 R4.1 136.779,119.377 139.573,116.583 139.573,112.522 144.272,107.823 144.272,98.171 151.067,91.376 U1.8
MQ-2_ADC: A1.4 A1.6 R15.1 U1.9 | length 43.6
  Top Layer w0.5: A1.6 119.056,83.115 118.491,82.55 118.491,80.01 119.056,79.445 A1.4 119.408,78.048 120.019,78.66 R15.1 125.777,78.486 126.878,78.486 136.149,87.757 149.416,87.757 149.708,88.05 149.708,89.383 U1.9
MQ_Heater_MCU: R16.1 U1.11 | length 18.7
  Top Layer w0.5: R16.1 132.583,90.085 133.773,90.085 137.16,93.472 144.78,93.472 147.257,90.995 U1.11
MQ_Heater_MosPowered: A1.5 T3.3 | length 7.5
  Top Layer w1: A1.5 124.681,85.641 T3.3
NetA1_2: A1.2 R23.2 | length 2.6
  Bottom Layer w1.2: R23.2 108.563,81.302 110.842,81.302 A1.2
NetD1_2: D1.2 L1.1 U3.2 | length 13.6
  Bottom Layer w1.2: D1.2@117.671,111.6 D1.2 118.628,110.643 121.941,110.643 U3.2
  Bottom Layer w1.5: L1.1@110.943,116.785 116.128,111.6 D1.2@117.671,111.6
NetE1_1: E1.1 P3.6 | length 3.2
  Top Layer w0.8: E1.1 P3.6
NetE2_1: E2.1 P4.4 | length 3.2
  Top Layer w0.8: E2.1 P4.4
NetLED1_1: LED1.1 R1.1 | length 6.5
  Top Layer w0.5: LED1.1 132.635,105.617 R1.1 R1.1@138.002,106.045
NetLED2_1: LED2.1 R9.1 | length 3.7
  Top Layer w0.8: LED2.1 115.62,97.105 115.62,93.858 R9.1
NetLED2_2: LED2.2 LED3.1 | length 32.4
  Bottom Layer w0.8: LED2.2 117.047,98.696 118.334,97.409 147.582,97.409 148.361,98.188 LED3.1
NetLED4_1: LED4.1 R11.1 | length 6.1
  Top Layer w0.8: R11.1 115.488,67.895 115.913,67.47 116.172,67.47 118.11,65.532 118.11,64.249 117.602,63.741 LED4.1
NetLED4_2: LED4.2 LED5.1 | length 45.3
  Bottom Layer w0.8: LED4.2 114.678,63.15 114.678,62.487 121.031,56.134 143.51,56.134 149.546,62.17 149.546,62.833 LED5.1
NetP1_2: P1.2 U1.35 | length 4.3
  Top Layer w0.5: U1.35 156.147,69.913 P1.2
NetP1_3: P1.3 U1.34 | length 3.8
  Top Layer w0.4: P1.3 154.845,68.739 154.845,72.44 U1.34
NetR6_2: R6.2 U1.24 | length 2.6
  Top Layer w0.5: R6.2@139.907,75.057 140.007,75.157 142.347,75.157 U1.24
NetR8_2: R8.2 R10.2 T1.1 | length 4.2
  Top Layer w0.5: T1.1 142.428,67.164 R10.2 144.446,67.183 R8.2
NetR13_2: R13.2 R14.2 T2.1 | length 5.9
  Top Layer w0.5: R14.2 127.919,58.801 127.061,57.943 T2.1 127.061,56.526 128.811,54.776 128.811,54.657 R13.2
NetR16_2: R16.2 R18.2 T3.1 | length 4.6
  Top Layer w0.5: T3.1 127.188,89.643 R18.2 R16.2
NetR19_2: R19.2 R21.2 T4.1 | length 4.4
  Top Layer w0.5: R19.2 126.365,96.898 127.411,95.852 127.411,95.725 127.886,95.25 R21.2 ; R21.2@128.063,95.123 128.402,95.462 T4.1
NetR20_1: R20.1 U2.1 | length 3
  Bottom Layer w0.5: R20.1 140.462,106.506 U2.1
Output: R22.2 T4.3 X1.2 | length 21.5
  Top Layer w0.8: X1.2 X1.2@128.627,100.862 ; T4.3 129.352,99.428 128.627,100.153 X1.2@128.627,100.862 ; v1(133.731,95.758) 131.869,97.62 131.869,97.651 130.161,99.359 130.13,99.359 X1.2@128.627,100.862
  Bottom Layer w0.8: v1@121.793,95.885 121.856,95.822 133.667,95.822 v1(133.731,95.758)
  other v1: 121.793,95.758
Output_MCU: R19.1 U1.27 | length 59.9
  Top Layer w0.5: R19.1 v1(126.365,103.124) ; U1.27 146.053,72.538 146.053,73.917 v1(147.32,75.184)
  Bottom Layer w0.5: v1(126.365,103.124) 128.778,103.124 132.842,99.06 136.652,99.06 137.287,99.695 150.876,99.695 151.765,98.806 151.765,95.123 147.32,90.678 v1(147.32,75.184)
PIR_ADC: P2.2 R7.2 U1.16 | length 9.9
  Top Layer w0.5: R7.2 134.493,80.742 134.968,81.217 136.589,81.217 P2.2 140.789,85.417 U1.16
SoftReset: R2.1 S1.1 U1.33 | length 32.4
  Top Layer w0.4: S1.1@151.066,44.64 151.066,51.625 151.066,58.102 153.607,60.643 U1.33
  Top Layer w0.5: v1(151.892,74.676) 152.039,74.529 153.055,74.529 153.607,73.977 U1.33
Status_LED: R1.2 U1.10 | length 19.4
  Top Layer w0.5: R1.2 138.811,102.536 138.811,97.663 141.986,94.488 145.034,94.488 148.527,90.995 U1.10
VCC_3.3: C2.2 C3.2 C6.1 DZ1.2 IC1.4 P3.4 P4.2 R2.2 R3.2 R4.2 R5.2 R17.2 U1.2 | length 158.3
  Top Layer w0.4: v1(156.591,81.534) 158.687,83.63 U1.2
  Top Layer w0.5: R4.2 139.194,122.127 146.044,115.277 IC1.4@146.044,114.771
  Top Layer w0.6: v1(142.494,117.221) 143.594,117.221 146.044,114.771 IC1.4
  Top Layer w0.9: R3.2 157.864,93.218 158.687,92.395 U1.2
  Top Layer w1.1: C6.1@149.118,106.934 154.444,101.608 DZ1.2@156.719,99.333 ; DZ1.2 156.719,98.785 157.814,97.69 157.814,97.155 157.814,95.25 R3.2
  Top Layer w1.2: IC1.4 146.044,110.008 C6.1@149.118,106.934
  Bottom Layer w0.4: R5.2@154.512,76.454 154.562,76.454 155.087,76.979 155.087,77.029 156.591,78.533 v1(156.591,81.534)
  Bottom Layer w0.6: P4.2 102.87,73.533 102.87,91.948 P3.4 103.251,96.139 103.251,113.538 109.728,120.015 117.348,120.015 122.682,125.349 137.033,125.349 142.494,119.888 v1(142.494,117.221) ; R2.2 R5.2
VCC_5: 1.VCC A1.1 A1.3 C5.1 IC1.3 L1.2 P2.1 P5.1 p6.1 pad.8 R7.1 R9.2 R11.2 R12.1 R23.1 SP1.1 U3.4 | length 213.9
  Top Layer w0.5: 1.VCC 134.834,42.443 136.351,43.96 R12.1 136.271,57.865 P5.1
  Top Layer w0.6: SP1.1 113.411,48.8 121.319,40.892 p6.1
  Top Layer w0.8: v2(136.144,67.437) 132.588,70.993 132.588,82.042 133.563,83.017 134.168,83.017 134.493,83.342 R7.1 136.224,83.392 P2.1
  Top Layer w1: 123.698,124.46 124.46,123.698 v1(124.46,114.046)
  Top Layer w1.2: R9.2@110.998,94.366 110.998,100.965 ; R9.2 111.588,85.516 113.411,83.693 113.411,79.051 112.408,78.048 A1.3 112.338,77.886 111.588,77.136 111.588,71.501 ; pad.8 113.03,100.965 110.998,100.965 ; v2(113.284,71.374) 113.157,71.501 111.588,71.501 ; SP1.1 113.411,53.063 111.588,54.886 R11.2 111.588,71.501 ; C5.1@124.353,121.412 C5.1 ; IC1.3@143.764,120.552 IC1.3 143.764,121.002 140.306,124.46 123.698,124.46 L1.2 110.998,100.965
  Bottom Layer w0.8: v2(136.144,67.437) 136.207,67.373 136.207,61.531 P5.1
  Bottom Layer w1: v2(113.284,71.374) 122.047,71.374 134.62,83.947 P2.1 ; U3.4 122.041,113.993 124.334,113.993 124.387,114.046 v1(124.46,114.046)
  Bottom Layer w1.2: R23.1 111.426,77.298 112.176,78.048 A1.3
VCC_Input: F1.1 R22.1 X1.4 | length 12.9
  Top Layer w0.8: X1.4 118.237,100.767 119.507,99.497 119.507,96.727 119.04,96.26 119.04,96.21 118.715,95.885 R22.1@118.665,95.885
  Bottom Layer w1.5: F1.1 115.571,103.758 X1.4
VCC_input_F: C4.1 F1.2 U3.1 | length 5.6
  Bottom Layer w1: F1.2 119.296,106.382 119.444,106.382 C4.1
  Bottom Layer w1.5: F1.2 119.046,106.982 119.505,106.982 121.391,108.868 U3.1
pads on no net: DZ1.0 M1. M1.S M2. M2.S M3. M3.S M4. M4.S P5.3 p6.3 p6.6 p6.H U1.4 U1.5 U1.14 U1.17 U1.18 U1.19 U1.20 U1.21 U1.22 U1.29 U1.30 U1.32 U1.36 U1.37

## Polygon pours and split planes (outlines as drawn)
GND on Top Layer "GND_L01_P002" (solid, remove dead copper, pour order 2): 101.854,115.316 112.522,122.555 132.08,127 148.209,124.206 161.798,116.205 161.798,46.609 150.241,39.497 132.08,35.814 114.935,39.243 101.854,47.498
GND on Bottom Layer "GND_L02_P003" (solid, remove dead copper, pour order 3): 101.854,115.316 112.649,122.555 131.953,127.127 148.463,124.079 161.798,116.205 161.798,46.609 149.987,39.37 132.334,35.814 114.681,39.37 101.854,47.498

## Other copper
Top Layer:
  text "Logic Matin" at 119.253,70.866 h1.52
Bottom Layer:
  text "Logic Matin" at 141.478,50.197 h2

## Silkscreen, mask and mechanical layers (free items; w line width, h text height)
Top Overlay:
  lines w0.254: 132.334,41.783 132.334,56.388 ; 132.334,106.426 132.334,121.031 ; 101.854,47.471 ccw(c132.334,81.407) 161.798,46.585 161.798,116.229 ccw(c132.334,81.407) 101.854,115.343 101.854,47.471

## Text inside footprints (layer, text, board x,y; h text height)
LED2: Top Overlay "IR" at 117.221,95.899 h1 r45
LED3: Top Overlay "IR" at 147.063,96.41 h1 r315
LED4: Top Overlay "IR" at 118.985,65.024 h1 r135
LED5: Top Overlay "IR" at 146.448,65.535 h1 r225
p6: Mechanical 1 "PCB EDGE" at 125.032,35.844 h0.7 r180
U1: Mechanical 13 "ANTENNA" at 163.697,86.972 h1.78 r270